# Altium PCB proLAYOUT_V3.PcbDoc
Units mm, origin at the board's own origin, x right, y up, seen from the top; angles counter-clockwise.
Board outline 152.4 x 101.6 mm, 2 copper layers (Top Layer, Bottom Layer); 82 components, 52 nets, 262 pads, 27 vias.
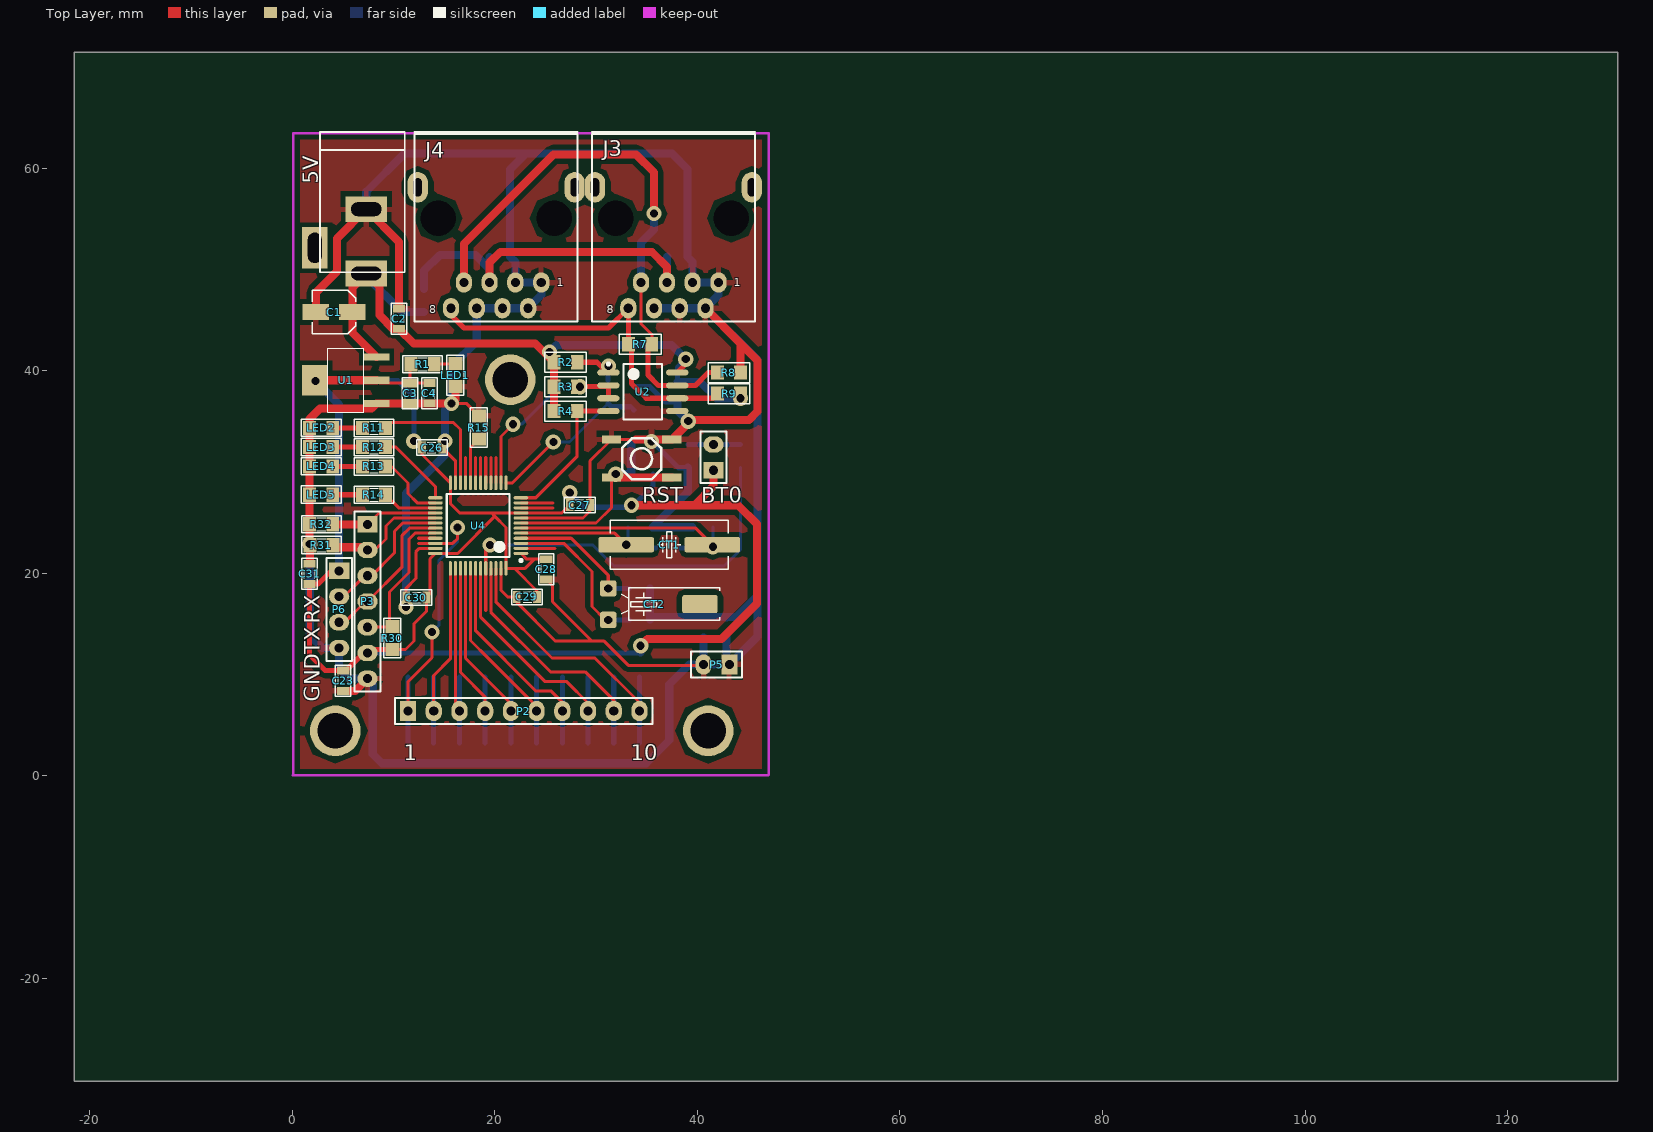
[diagram p0: Top Layer view]
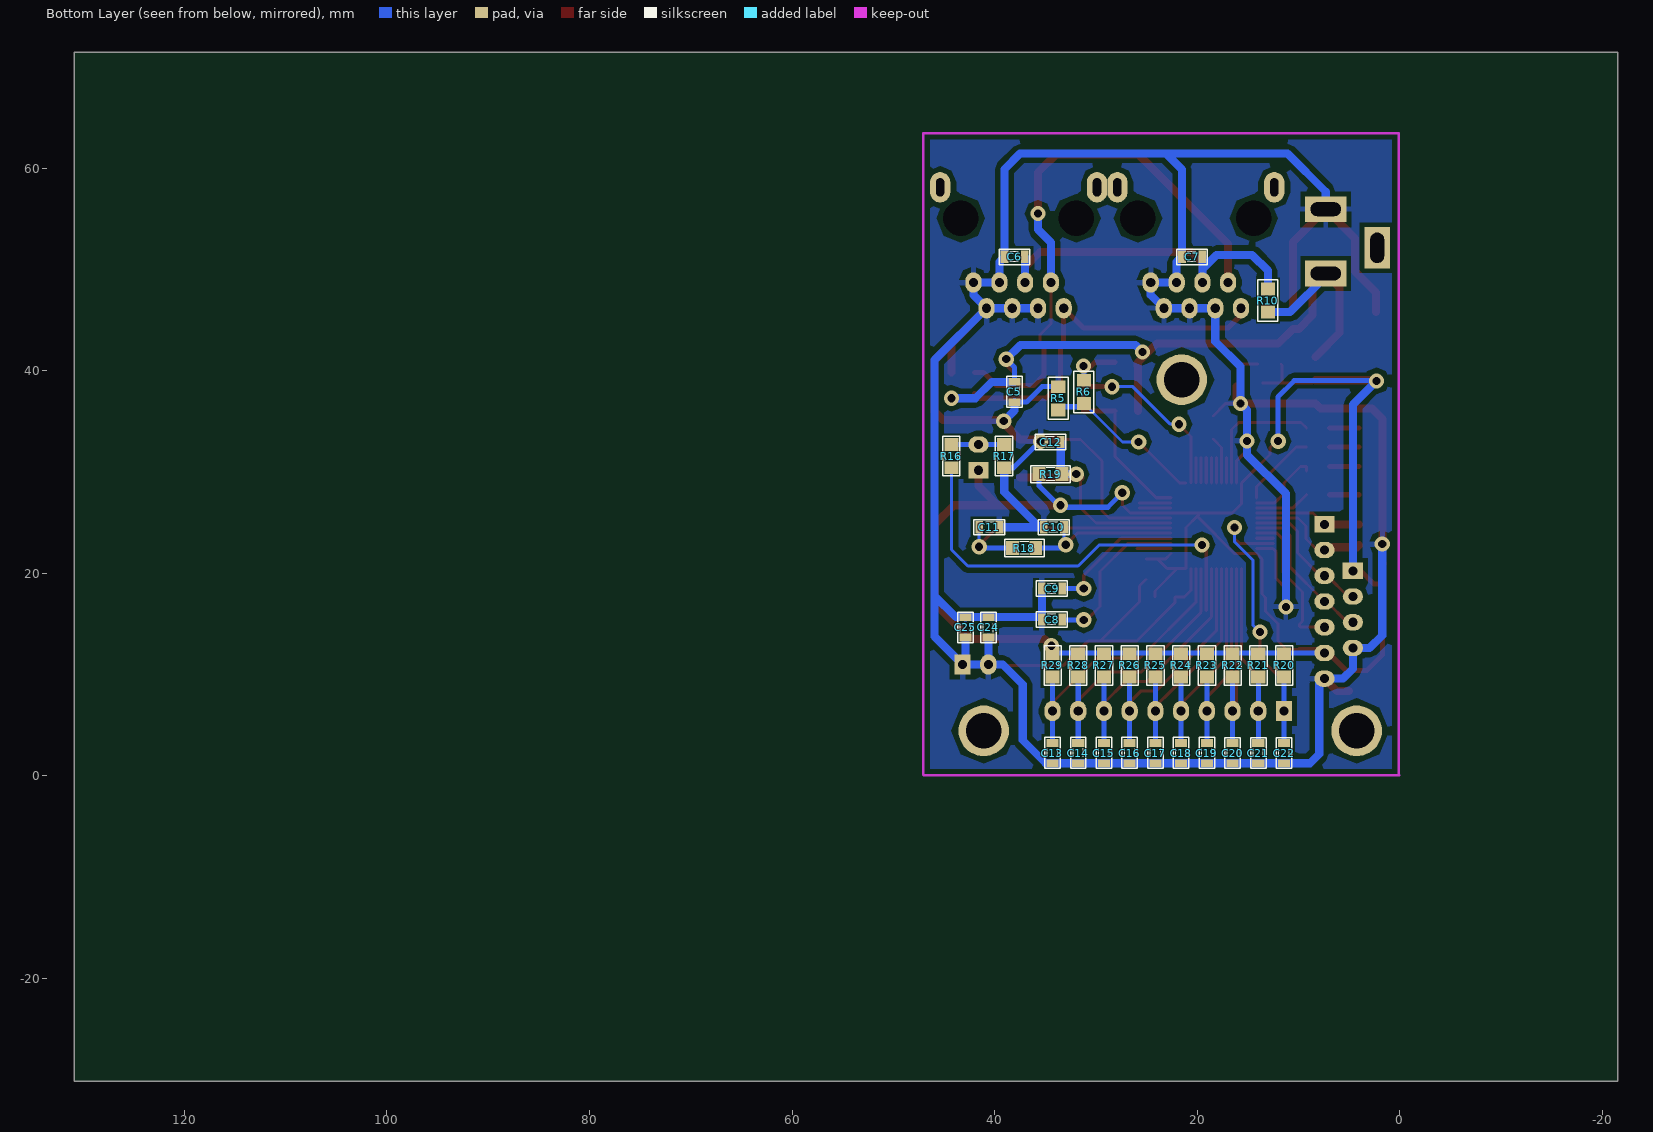
[diagram p1: Bottom Layer view, seen from below]
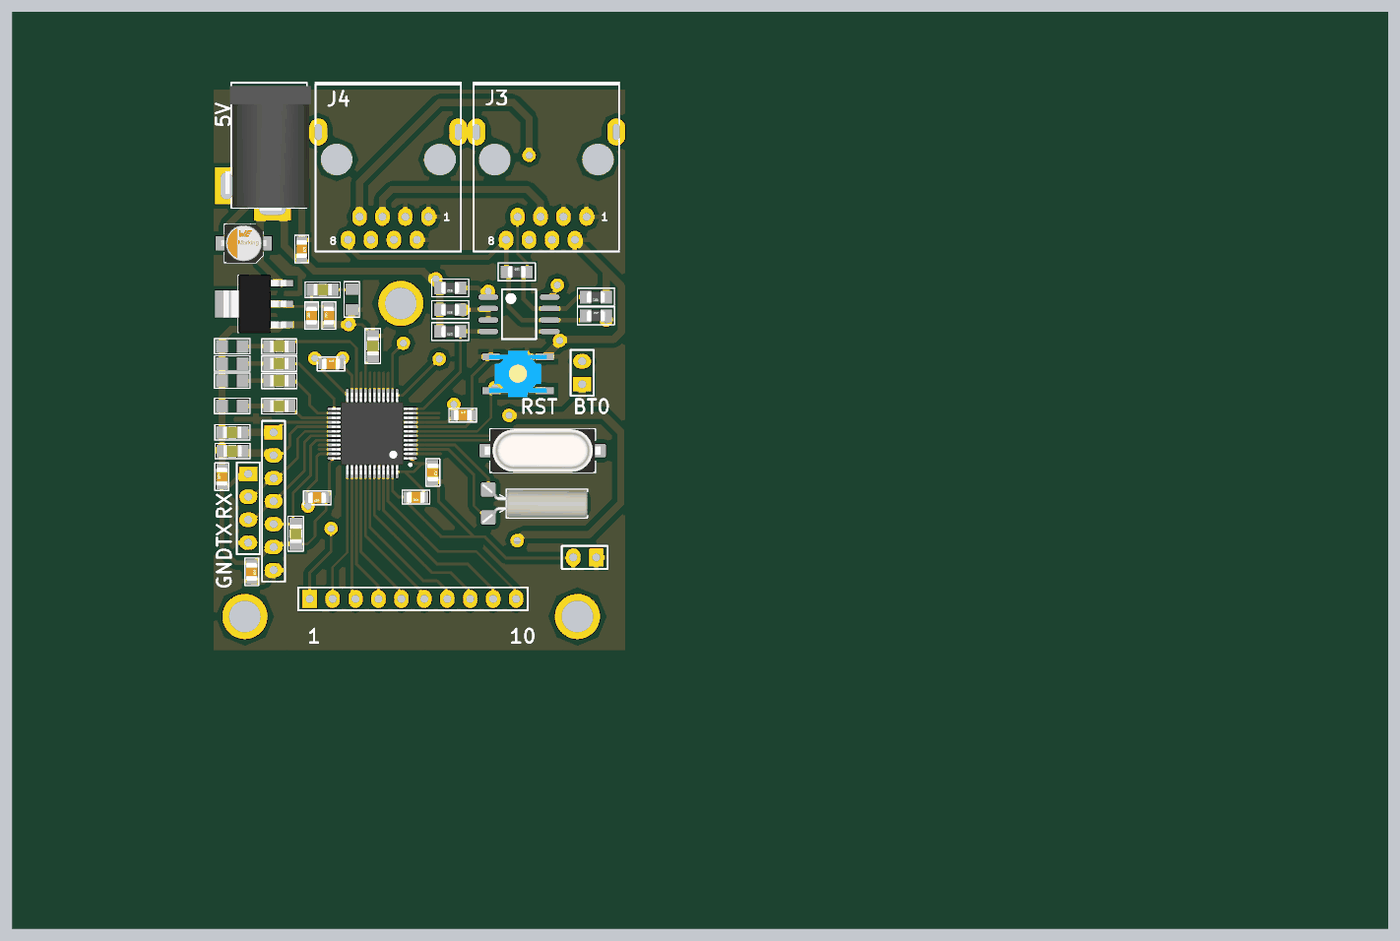
[diagram p2: 3D render of the assembled board from above, using the file's embedded part models]
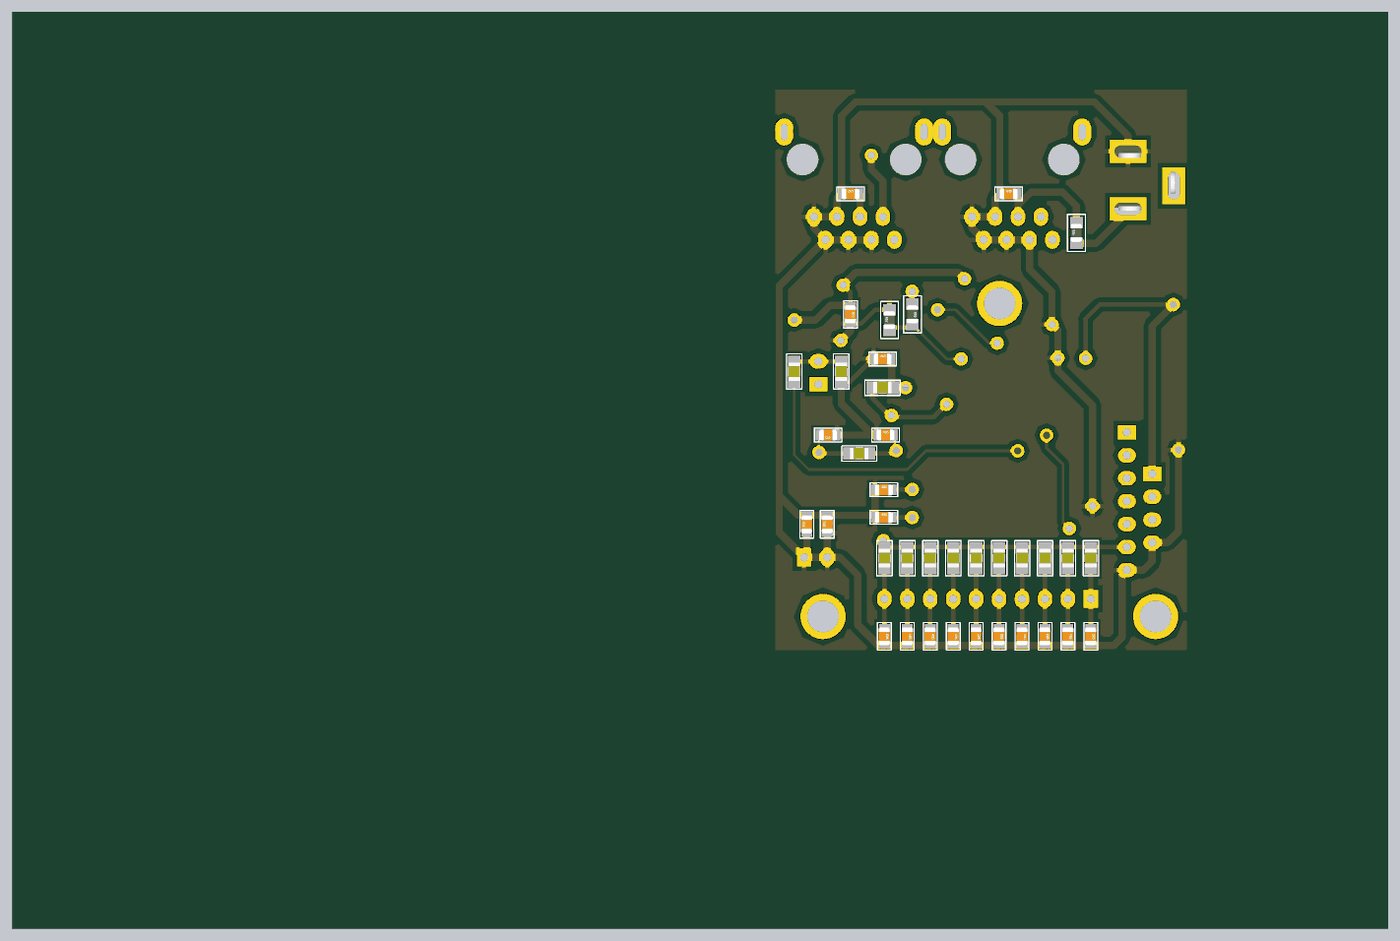
[diagram p3: 3D render of the assembled board from below, using the file's embedded part models]

## Layer stack, top to bottom
Top Solder: solder mask 0.0102, Solder Resist, Dk 3.5
Top Layer: signal copper 0.0356
Dielectric 1: dielectric 0.32, FR-4, Dk 4.8
Bottom Layer: signal copper 0.0356
Bottom Solder: solder mask 0.0102, Solder Resist, Dk 3.5

## Board outline
-21.525,-30.15 130.875,-30.15 130.875,71.45 -21.525,71.45

## Design rules (kind name [scope] priority, off if disabled: settings)
Clearance [All] p1: gap=0.5
ComponentClearance [All] p1: gap=0.2 collisioncheckmode=3 verticalgap=0.2 showdistances=FALSE
HoleSize [All] p1 off: absolutevalues=TRUE maxlimit=2.54 minlimit=0.025 maxpercent=80.000 minpercent=20.000
HoleToHoleClearance [All] p1 off: gap=0.254 allowstackedmicrovias=TRUE
LayerPairs [All] p1 off: enforce=TRUE
MinimumSolderMaskSliver [All] p1 off: minsoldermaskwidth=0.254
PolygonConnect [All] p1: connectstyle=Relief reliefconductorwidth=0.5 reliefentries=4 polygonreliefangle="90 Angle" airgapwidth=0.5
RoomDefinition proLAYOUT [InComponentClass('proLAYOUT')] p1: confinementstyle=ConfineIn formatcopy=TRUE lockcomponents=FALSE outline 132.018,-28.626 638.24,-28.626 638.24,-0.178 132.018,-0.178
RoutingPriority SINGAL_PRIO [All] p1: routingpriority=2
RoutingPriority POWER_PRIO [(InNet('VCC3.3V') OR InNet('VCC5V') OR InNet('GND'))] p2: routingpriority=1
RoutingVias [All] p1: holewidth=0.8 width=1.5 viastyle="Through Hole" minholewidth=0.8 minwidth=1.5 maxholewidth=1 maxwidth=2
SilkToSilkClearance [All] p1 off: silktosilkclearance=0.254
SilkToSolderMaskClearance [IsPad] p1 off: minsilkscreentomaskgap=0.254 clearancetoexposedcopper=TRUE
SolderMaskExpansion [All] p1: expansion=0.102
Width SIGNAL_LINE [All] p1: maxlimit=0.8 minlimit=0.3 preferedwidth=0.5
Width POWER_LINE [(InNet('VCC5V') OR InNet('VCC3.3V') OR InNet('GND'))] p2: maxlimit=0.8 minlimit=0.3 preferedwidth=0.5
22 further rules are at their usual default settings.

## Components (designator, comment, footprint, x,y, rotation, side; value= is the part's Value field where it differs from the comment)
5V "5V" DC-IN 4.764,52.781 r270 top (schematic designator VCC)
BT0 "BOOT0" HDR1X2 41.594,30.175 r90 top (schematic designator P1)
C1 "10µF" CAP-ALU-SMD-4.5x5x1.4 4.129,45.796 r180 top
C2 "104" SM-CAP-0805#1 10.55,46.3 r270 top
C3 "10uF" SM-CAP-0805#2 11.642,36.631 r90 top
C4 "104" SM-CAP-0805#1 13.547,36.631 r90 top
C5 "104" SM-CAP-0805#1 38.038,39.065 r270 bottom
C6 "104" SM-CAP-0805#1 39.181,51.257 r180 bottom
C7 "104" SM-CAP-0805#1 21.655,51.257 r180 bottom
C8 "10pF" SM-CAP-0805#1 35.486,15.439 r180 bottom
C9 "10pF" SM-CAP-0805#1 35.486,18.487 r180 bottom
C10 "22pF" SM-CAP-0805#1 35.306,24.552 r180 bottom
C11 "22pF" SM-CAP-0805#1 39.37,24.552 r0 bottom
C12 "104" SM-CAP-0805#1 35.625,32.969 r180 bottom
C13 "104" SM-CAP-0805#1 34.285,3.41 r270 bottom
C14 "104" SM-CAP-0805#1 31.745,3.41 r270 bottom
C15 "104" SM-CAP-0805#1 29.205,3.41 r270 bottom
C16 "104" SM-CAP-0805#1 26.665,3.41 r270 bottom
C17 "104" SM-CAP-0805#1 24.125,3.41 r270 bottom
C18 "104" SM-CAP-0805#1 21.585,3.41 r270 bottom
C19 "104" SM-CAP-0805#1 19.045,3.41 r270 bottom
C20 "104" SM-CAP-0805#1 16.505,3.41 r270 bottom
C21 "104" SM-CAP-0805#1 13.965,3.41 r270 bottom
C22 "104" SM-CAP-0805#1 11.425,3.41 r270 bottom
C23 "104" SM-CAP-0805#1 5.025,10.55 r270 top
C24 "104" SM-CAP-0805#1 40.619,13.511 r90 bottom
C25 "104" SM-CAP-0805#1 42.88,13.511 r90 bottom
C26 "104" SM-CAP-0805#1 12.65,32.425 r0 top
C27 "104" SM-CAP-0805#1 27.243,26.746 r0 top
C28 "104" SM-CAP-0805#1 25.075,21.55 r270 top
C29 "104" SM-CAP-0805#1 24.325,17.675 r180 top
C30 "104" SM-CAP-0805#1 13.4,17.602 r180 top
C31 "104" SM-CAP-0805#1 1.7,18.8 r90 top
CT1 "8Mhz" CRYSTAL_HC49-US-SM 37.225,22.825 r180 top
CT2 "32.768Khz" "CRYSTAL SMD 32,768 kHz" 33.2,16.963 r180 top
J3 "RJ45" "RJ45 - 18" 37.635,50.622 r0 top
J4 "RJ45" "RJ45 - 18" 20.131,50.622 r0 top
LED1 "LED" L-0805 16.1,39.575 r270 top
LED2 "LED" L-0805 2.859,34.366 r180 top
LED3 "LED" L-0805 2.859,32.461 r180 top
LED4 "LED" L-0805 2.859,30.556 r180 top
LED5 "LED" L-0805 2.859,27.762 r180 top
P2 "IRQ_HEADER" HDR1X10 11.425,6.401 r0 top
P3 "RF_HEAD_1" HDR1X7 7.431,24.841 r270 top
P5 "IRQ_PW" HDR1X2 43.159,10.997 r180 top
P6 "UART" HDR1X4 4.625,20.25 r270 top
R1 "1K" SM-0805 12.875,40.65 r0 top
R2 "10K" R-0805 26.989,40.843 r180 top
R3 "10K" R-0805 26.989,38.43 r180 top
R4 "10K" R-0805 26.989,36.017 r180 top
R5 "1.5K" R-0805 33.72,37.287 r90 bottom
R6 "1K" R-0805 31.18,37.922 r270 bottom
R7 "120R" R-0805 34.355,42.621 r0 top
R8 "22K" R-0805 43.118,39.827 r180 top
R9 "22K" R-0805 43.125,37.75 r0 top
R10 "0R" R-0805 13.019,46.939 r90 bottom
R11 "1K" SM-0805 8.066,34.366 r0 top
R12 "1K" SM-0805 8.066,32.461 r0 top
R13 "1K" SM-0805 8.066,30.556 r0 top
R14 "1K" SM-0805 8.066,27.762 r0 top
R15 "10K" SM-0805 18.425,34.4 r270 top
R16 "10K" SM-0805 44.261,31.572 r270 bottom
R17 "10K" SM-0805 39.054,31.572 r270 bottom
R18 "1M" SM-0805 37.075,22.5 r0 bottom
R19 "10K" SM-0805 34.482,29.794 r180 bottom
R20 "10K" SM-0805 11.425,10.922 r90 bottom
R21 "10K" SM-0805 13.965,10.922 r90 bottom
R22 "10K" SM-0805 16.505,10.922 r90 bottom
R23 "10K" SM-0805 19.045,10.922 r90 bottom
R24 "10K" SM-0805 21.585,10.922 r90 bottom
R25 "10K" SM-0805 24.125,10.922 r90 bottom
R26 "10K" SM-0805 26.665,10.922 r90 bottom
R27 "10K" SM-0805 29.205,10.922 r90 bottom
R28 "10K" SM-0805 31.745,10.922 r90 bottom
R29 "10K" SM-0805 34.285,10.922 r90 bottom
R30 "10K" SM-0805 9.895,13.614 r270 top
R31 "10K" SM-0805 2.875,22.775 r180 top
R32 "10K" SM-0805 2.859,24.841 r180 top
RST "RESET" "SW4 CMD M" 34.482,31.318 r0 top (schematic designator SW1)
U1 "LM1117-3.3V" LM1117-SOP 7.05,39.065 r90 top
U2 "MAX485" SO8W_N 34.609,37.922 r0 top
U4 "STM32F103C8T6" STM32_LQPF48 18.353,24.714 r180 top

## Footprints (in the part's own frame and the unit in brackets; to place one, negate y for a bottom-side part, rotate by r counter-clockwise, add the part's x,y. Pads: shape width x height; smd on the part's side, far side on the other; paste and mask are expansions set on the pad)
CAP-ALU-SMD-4.5x5x1.4 [mm]
  rect 2.6x1.6 smd: 1(-1.8,0) 2(1.8,0)
  silkscreen extent -2.15,-2.15 2.15,2.15, body extent -2.5,-2.15 2.5,2.15, height 5.45
"CRYSTAL SMD 32,768 kHz" [mm] "SMD Crystal CMR309T package"
  round 0.508 on Mech15: 0(0,0)
  rrect25% 1.6x1.6 smd: 1(2,-1.55) 2(2,1.55)
  rrect25% 3.5x1.8 smd: SH(-7.05,0)
  silkscreen extent -9,-1.6 0.72,1.6, body extent -9,-2.25 2.73,2.25, height 3.07
CRYSTAL_HC49-US-SM [mm] "SMD Crystal HC49/US-SM package"
  round 0.508 on Mech15: 0(0,0)
  rrect25% 5.5x1.5 smd: 1(-4.25,0) 2(4.25,0)
  silkscreen extent -5.84,-2.41 5.84,2.41, body extent -6.4,-2.41 6.4,2.42, height 4.29
DC-IN [mm] "Jac DC input"
  rect 2.54x4.064 hole 1.35 slot 3 at 90 deg: 1(3.175,2.54) 2(-3.175,2.54)
  rect 4.064x2.54 hole 1.35 slot 3 at 0 deg: 3(0.635,-2.54)
  silkscreen extent -10.8,-2.03 3.05,6.35, body extent -10.42,-2.67 3.4,6.84, height 11.02
HDR1X2 [mm] "Connector; Header; 2 Position"
  rect 1.6x2 hole 0.9: 1(0,0)
  oval 1.6x2 hole 0.9: 2(2.54,0)
  silkscreen extent -1.27,-1.27 3.81,1.27, body extent -1.27,-1.27 3.81,1.27, height 7
HDR1X4 [mm] "Connector; Header; 4 Position"
  rect 1.6x2 hole 0.9: 1(0,0)
  oval 1.6x2 hole 0.9: 2(2.54,0) 3(5.08,0) 4(7.62,0)
  silkscreen extent -1.27,-1.27 8.89,1.27, body extent -1.27,-1.27 8.89,1.27, height 7
HDR1X7 [mm] "Connector; Header; 7 Position"
  rect 1.6x2 hole 0.9: 1(0,0)
  oval 1.6x2 hole 0.9: 2(2.54,0) 3(5.08,0) 4(7.62,0) 5(10.16,0) 6(12.7,0) 7(15.24,0)
  silkscreen extent -1.27,-1.27 16.51,1.27, body extent -1.27,-1.27 16.51,1.27, height 7
HDR1X10 [mm] "Connector; Header; 10 Position"
  rect 1.6x2 hole 0.9: 1(0,0)
  oval 1.6x2 hole 0.9: 2(2.54,0) 3(5.08,0) 4(7.62,0) 5(10.16,0) 6(12.7,0) 7(15.24,0) 8(17.78,0) 9(20.32,0) 10(22.86,0)
  silkscreen extent -1.27,-1.27 24.13,1.27, body extent -1.27,-1.27 24.13,1.27, height 7
L-0805 [mil] "Compoment SMD 80x50mil"
  rect 50x55 smd: 1(-45,0) 2(45,0)
  silkscreen extent -77,-34 78,33, body extent -50,-20 50,20, height 43
LM1117-SOP [mm]
  rect 0.7x2.54 smd: 1(-2.3,-1.27) 2(0,-1.27) 3(2.3,-1.27)
  rect 3x2.54 smd: 2(0,4.826)
  silkscreen extent -3.18,0 3.17,3.56, body extent -3.25,-1.78 3.25,5.18, height 1.68
R-0805 [mil] "Compoment SMD 80x50mil"
  rect 50x55 smd: 1(-45,0) 2(45,0)
  silkscreen extent -81,-39 81,39, body extent -39,-25 39,25, height 31
"RJ45 - 18" [mm] "Single Port RJ45 Connector with Intergrated Magetic (LAN) - NonLED"
  oval 2x3 hole 0.8 slot 1.8 at 90 deg: 0(-7.745,7.495) 0(7.745,7.495)
  oval 1.6x2 hole 0.9: 1(4.458,-1.905) 2(3.162,-4.445) 3(1.892,-1.905)
  oval 1.6x2 hole 0.9 paste+2.54: 4(0.622,-4.445) 5(-0.648,-1.905) 6(-1.918,-4.445) 7(-3.188,-1.905) 8(-4.458,-4.445)
  round 2 hole 3.5 paste+2.54: Hole1(-5.715,4.445) Hole1(5.715,4.445)
  silkscreen extent -8.05,-5.74 8.05,12.95
SM-0805 [mil] "Compoment SMD 80x50mil"
  rect 50x55 smd: 1(-45,0) 2(45,0)
  silkscreen extent -77,-34 76,33, body extent -40,-25 40,25, height 24
SM-CAP-0805#1 [mil]
  rect 30x47.24 smd: 1(6,0) 2(85,0)
  silkscreen extent -15,-30 105,30, body extent 6,-25 84,25, height 31
SM-CAP-0805#2 [mil]
  rect 35.43x55.12 smd: 1(6,0) 2(85,0)
  silkscreen extent -15,-30 105,30, body extent 6,-25 84,25, height 31
SO8W_N [mm] "SOP, 8-Leads, Body 5.3x5.3mm, Pitch 1.27mm, IPC Medium Density"
  oval 2.2x0.6 smd: 1(-3.4,1.905) 2(-3.4,0.635) 3(-3.4,-0.635) 4(-3.4,-1.905) 5(3.4,-1.905) 6(3.4,-0.635) 7(3.4,0.635) 8(3.4,1.905)
  silkscreen extent -3.52,-2.75 1.9,2.88, body extent -2.73,-2.75 2.73,2.75, height 2.13
STM32_LQPF48 [mm]
  oval 1.45x0.3 smd: 1(-4.225,2.75) 2(-4.225,2.25) 3(-4.225,1.75) 4(-4.225,1.25) 5(-4.225,0.75) 6(-4.225,0.25) 7(-4.225,-0.25) 8(-4.225,-0.75) 9(-4.225,-1.25) 10(-4.225,-1.75) 11(-4.225,-2.25) 12(-4.225,-2.75) 25(4.225,-2.75) 26(4.225,-2.25) 27(4.225,-1.75) 28(4.225,-1.25) 29(4.225,-0.75) 30(4.225,-0.25) 31(4.225,0.25) 32(4.225,0.75) 33(4.225,1.25) 34(4.225,1.75) 35(4.225,2.25) 36(4.225,2.75)
  oval 0.3x1.45 smd: 13(-2.75,-4.225) 14(-2.25,-4.225) 15(-1.75,-4.225) 16(-1.25,-4.225) 17(-0.75,-4.225) 18(-0.25,-4.225) 19(0.25,-4.225) 20(0.75,-4.225) 21(1.25,-4.225) 22(1.75,-4.225) 23(2.25,-4.225) 24(2.75,-4.225) 37(2.75,4.225) 38(2.25,4.225) 39(1.75,4.225) 40(1.25,4.225) 41(0.75,4.225) 42(0.25,4.225) 43(-0.25,4.225) 44(-0.75,4.225) 45(-1.25,4.225) 46(-1.75,4.225) 47(-2.25,4.225) 48(-2.75,4.225)
  silkscreen extent -4.35,-3.1 3.1,3.57, body extent -4.5,-4.5 4.5,4.5, height 1.6
"SW4 CMD M" [mil]
  rect 75x30 smd: 1(-117,75) 1(118,75) 2(-117,-73) 2(118,-73)
  silkscreen extent -75,-80 76,79, body extent -126,-101 126,103, height 60

## Part data
5V: library part DCIN
BT0 P5: library part "Header 2", "Header, 2-Pin"
C1: library part "CAP Aluminum"
C2 C3 C4 C5 C6 C7 C8 C9 C10 C11 C12 C13 C14 C15 C16 C17 C18 C19 C20 C21 C22 C23 C24 C25 C26 C27 C28 C29 C30 C31: library part "CAP SMD"
CT1 CT2: library part CRYSTAL, "Crystal For all Crystal 2pin."
J3 J4: library part RJ45-LAN, "Single RJ45 Connector Non LED"
LED1 LED2 LED3 LED4 LED5: "LED Single colour Green and Red"
P2: library part "Header 10", "Header, 10-Pin"
P3: library part "Header 7", "Header, 7-Pin"
P6: library part "Header 4", "Header, 4-Pin"
R1 R11 R12 R13 R14 R15 R16 R17 R18 R19 R20 R21 R22 R23 R24 R25 R26 R27 R28 R29 R30 R31 R32: library part RM, "Resistor SMD"
R2 R3 R4 R5 R6 R7 R8 R9 R10: library part R, "Resistor 1/4W"
RST: library part SW4-1, "Switch button 4 pin"
U1: library part LM1117, "800mA Low-Dropout Linear Regulator"
U2: library part max485_smd
U4: library part STM32F103xx_LQFP48, "STM32 ARM-based 32-bit MCU with 64 Kbytes Flash, 48-pin LQFP, Industrial Temperature"

## Free pads (board coordinates)
  round 5 hole 3.5: 1(41.075,4.45) 2(4.25,4.45) 3(21.525,39.125)

## Via types
v1: diameter 1.5, hole 0.8, Top Layer to Bottom Layer, 27 vias

## Nets (pads, with @x,y where several pads share a name; then routed paths per layer and width w, separated by ;. In a path a pad name is that pad's centre, name@x,y a point inside that pad or via, vN(x,y) a via of type N, cw(c..) or ccw(c..) an arc to the next point about the centre after c; other vN are vias at no path point)
BOOT_0: R16.2 U4.44 | length 41
  Top Layer w0.3: 19.103,16.325 U4.44 19.103,22.378 v1(19.525,22.8)
  Bottom Layer w0.3: v1(19.525,22.8) 29.675,22.8 31.75,20.725 42.65,20.725 44.261,22.336 R16.2
BOOT_1: R15.2 U4.20 | length 4.7
  Top Layer w0.3: U4.20 17.603,32.435 R15.2
GND: 5V.2 C1.2 C2.1 C3.1 C4.1 C5.2 C6.1 C7.1 C8.1 C9.1 C10.1 C11.1 C12.1 C13.2 C14.2 C15.2 C16.2 C17.2 C18.2 C19.2 C20.2 C21.2 C22.2 C23.2 C24.1 C24.2 C25.1 C25.2 C26.2 C27.2 C28.2 C29.2 C30.2 C31.2 J3.1 J3.2 J3.3 J3.4 J3.6 J4.1 J4.2 J4.3 J4.4 J4.6 LED1.2 LED2.2 LED3.2 LED4.2 LED5.2 P3.7 P5.1 P5.2 P6.4 R5.2 R8.1 R15.1 R17.2 R31.2 R32.2 RST.1 U1.1 U2.5 U4.8 U4.23 U4.35 U4.47 | length 416.6
  Top Layer w0.3: v1(11.241,16.684) C30.2 11.241,18.541 12.2,19.5 12.2,22.125 12.539,22.464 U4.35 ; C26.2 16.103,31.131 U4.23 ; v1(15.733,36.783) 17.185,36.783 R15.1 ; U4.47 20.603,18.322 21.25,17.675 C29.2 22.166,17.134 26,13.3 29.6,13.3 ; U4.8 28.714,25.464 29.402,26.152 C27.2 29.402,31.115 31.51,33.223 33.95,33.223 ; C28.2 25.7,18.766 25.7,17.2 29.6,13.3 ; P5.2 40.544,10.922 33.178,10.922 30.8,13.3 29.6,13.3
  Top Layer w0.8: C31.2 1.732,20.991 R31.2 1.732,22.893 v1(1.725,22.9) ; R31.2@1.716,22.791 LED5.2 LED4.2 LED3.2 LED2.2 1.716,35.241 2.75,36.275 7.83,36.275 U1.1 13.529,36.765 C4.1 v1(15.733,36.783) 16.1,37.15 LED1.2 ; C1.2 2.329,47.729 4.4,49.8 4.4,53.052 5V.2 10.55,52.71 C2.1 ; C23.2 6.221,8.391 P3.7 ; 33.95,33.223 v1@35.473,33.223 ; v1@35.475,33.223 37.479,33.223 39.406,35.15 45.1,35.15 45.95,36 45.95,41.024 44.261,42.713 ; J3.2 44.261,42.713 ; R8.1 44.261,42.713
  Bottom Layer w0.5: R5.2 35.32,38.43 36.844,36.906 C5.2 ; v1(35.473,33.023) C12.1 35.606,32.969 38.146,30.429 R17.2
  Bottom Layer w0.8: v1(1.725,22.9) 1.725,13.875 2.97,12.63 P6.4 4.625,10.575 5.599,9.601 P3.7 7.95,9.082 7.95,2.178 8.876,1.251 34.951,1.251 37.225,3.525 37.225,5.9 37.225,9.025 39.197,10.997 P5.2 ; 5V.2 7.304,57.679 11.075,61.45 23.075,61.45 ; v1(11.241,16.684) 11.241,27.866 15.075,31.7 v1(15.075,33.076) 15.075,36.125 v1(15.733,36.783) 15.733,40.408 18.213,42.888 J4.6 J4.4 J4.2 24.589,47.472 J4.1 J4.3 22.023,50.736 C7.1 21.503,59.878 23.075,61.45 ; C9.1 C8.1 ; C8.1@35.49,15.595 C8.1 ; J3.6 J3.4 J3.2 ; C5.2 38.038,36.087 v1(39.101,35.024) ; R17.2 39.054,28.031 35.575,24.552 C11.1 ; C24.1 P5.2 ; C25.1 42.88,11.276 P5.1 ; P5.1@43.497,10.997 P5.1 ; 23.075,61.45 37.482,61.45 39.029,59.904 C6.1 39.527,50.758 J3.3 J3.1 42.093,47.472 J3.2 ; C8.1 35.565,15.67 C24.2 42.879,15.67 43.82,15.67 45.925,17.775 ; P5.2 P5.1 ; J3.2 45.925,41.049 45.925,17.775 ; P5.1 45.925,13.763 45.925,17.775
IRQ_1: C22.1 P2.1 R20.1 U4.34 | length 32.3
  Top Layer w0.3: P2.1 11.425,9.3 13.8,11.675 v1(13.8,14.2) ; 12.464,22.964 U4.34 15.839,22.964 16.325,23.45 16.325,24.751 v1(16.325,24.525)
  Bottom Layer w0.3: v1(13.8,14.2) 14.5,14.9 14.5,21.325 16.328,23.153 16.325,23.156 v1(16.325,24.525)
  Bottom Layer w0.5: C22.1 P2.1 R20.1
IRQ_2: C21.1 P2.2 R21.1 U4.37 | length 21.3
  Top Layer w0.3: P2.2 13.965,9.915 15.603,11.553 U4.37
  Bottom Layer w0.5: C21.1 P2.2 R21.1
IRQ_3: C20.1 P2.3 R22.1 U4.38 | length 20.8
  Top Layer w0.3: U4.38 16.103,6.803 P2.3
  Bottom Layer w0.5: C20.1 P2.3 R22.1
IRQ_4: C19.1 P2.4 R23.1 U4.39 | length 21.6
  Top Layer w0.3: U4.39 16.603,10.222 19.045,7.78 P2.4
  Bottom Layer w0.5: C19.1 P2.4 R23.1
IRQ_5: C18.1 P2.5 R24.1 U4.40 | length 22.5
  Top Layer w0.3: U4.40 17.103,11.622 21.585,7.14 P2.5
  Bottom Layer w0.5: C18.1 P2.5 R24.1
IRQ_6: C17.1 P2.6 R25.1 U4.41 | length 23.3
  Top Layer w0.3: U4.41 17.603,13.375 17.703,13.275 19.309,11.669 22.52,8.458 24.125,6.853 P2.6
  Bottom Layer w0.5: C17.1 P2.6 R25.1
IRQ_7: C16.1 P2.7 R26.1 U4.42 | length 25
  Top Layer w0.3: U4.42 18.103,14.322 24.025,8.4 25.525,8.4 26.665,7.26 P2.7
  Bottom Layer w0.5: C16.1 P2.7 R26.1
IRQ_8: C15.1 P2.8 R27.1 U4.43 | length 26.2
  Top Layer w0.3: U4.43 18.603,15.675 24.978,9.3 27.1,9.3 29.205,7.195 P2.8
  Bottom Layer w0.5: C15.1 P2.8 R27.1
IRQ_9: C14.1 P2.9 R28.1 U4.45 | length 27.6
  Top Layer w0.3: U4.45 19.603,16.172 25.5,10.275 28.925,10.275 31.745,7.455 P2.9
  Bottom Layer w0.5: C14.1 P2.9 R28.1
IRQ_10: C13.1 P2.10 R29.1 U4.46 | length 29
  Top Layer w0.3: U4.46 20.103,17.197 25.65,11.65 29.875,11.65 34.285,7.24 P2.10
  Bottom Layer w0.5: C13.1 P2.10 R29.1
LED_1: R11.2 U4.22 | length 13.2
  Top Layer w0.3: R11.2 9.743,34.9 15.9,34.9 16.603,34.197 U4.22
LED_2: R12.2 U4.25 | length 7.6
  Top Layer w0.3: R12.2 10.25,32.461 14.128,28.583 U4.25
LED_3: R13.2 U4.26 | length 7.5
  Top Layer w0.3: R13.2@9.209,30.091 R13.2 9.794,30.556 11.425,28.925 11.425,27.875 12.336,26.964 U4.26
LED_4: R14.2 U4.27 | length 5.5
  Top Layer w0.3: R14.2 10.507,26.464 U4.27
M485_A: J3.8 J4.8 R7.1 R9.1 U2.6 | length 36.4
  Top Layer w0.5: J4.8 15.673,45.502 16.95,44.225 31.225,44.225 J3.8 33.212,46.142 R7.1 33.475,42.358 33.475,38.75 34.938,37.287 U2.6 41.519,37.287 R9.1
M485_B: J3.7 J4.7 R7.2 R8.2 U2.7 | length 55.9
  Top Layer w0.3: J3.7 34.447,44.628 35.498,43.577 R7.2
  Top Layer w0.5: R7.2 35.125,42.248 35.125,39.575 36.143,38.557 U2.7 39.807,38.557 41.077,39.827 R8.2
  Top Layer w0.8: J4.7 16.943,52.543 25.775,61.375 33.95,61.375 35.725,59.6 v1(35.725,55.525)
  Bottom Layer w0.8: J3.7 34.447,52.672 35.725,53.95 v1(35.725,55.525)
M485_DI: R4.1 U2.4 U4.12 | length 14.8
  Top Layer w0.3: U4.12 24.039,27.464 26.743,30.168 28.132,31.557 R4.1
  Top Layer w0.5: R4.1 U2.4
M485_EN: R3.1 U2.2 U2.3 U4.14 | length 18.8
  Top Layer w0.3: U4.14 20.603,33.503 21.8,34.7 v1(21.8,34.725)
  Top Layer w0.5: R3.1 v1(28.395,38.43) 31.082,38.43 U2.2 U2.3
  Bottom Layer w0.3: v1(21.8,34.725) 22.65,34.725 26.355,38.43 v1(28.395,38.43)
M485_PW: C6.2 C7.2 J3.5 J4.5 R10.2 | length 36.7
  Top Layer w0.8: J4.5 19.483,50.683 20.55,51.75 35.5,51.75 36.987,50.263 J3.5
  Bottom Layer w0.8: R10.2 13.019,49.894 14.575,51.45 18.075,51.45 19.483,50.042 ; J4.5 19.483,50.042 ; C7.2@19.483,51.244 19.483,50.042 ; J3.5 36.987,51.222 C6.2
M485_RO: R5.1 R6.2 U4.13 | length 16.1
  Top Layer w0.3: U4.13 21.739,28.939 v1(25.775,32.975)
  Bottom Layer w0.3: v1(25.775,32.975) 27.376,32.975 R6.2
  Bottom Layer w0.5: R6.2 31.509,36.45 33.414,36.45 R5.1
NetLED1_1: LED1.1 R1.2 | length 2.1
  Top Layer w0.3: R1.2 16.032,40.65 LED1.1
NetLED2_1: LED2.1 R11.1 | length 2.9
  Top Layer w0.5: LED2.1 R11.1
NetLED3_1: LED3.1 R12.1 | length 2.9
  Top Layer w0.5: LED3.1 R12.1
NetLED4_1: LED4.1 R13.1 | length 2.9
  Top Layer w0.5: LED4.1 R13.1
NetLED5_1: LED5.1 R14.1 | length 2.9
  Top Layer w0.5: LED5.1 R14.1
NetP1_2: BT0.2 R16.1 R17.1 | length 5.2
  Bottom Layer w0.5: R17.1 BT0.2 R16.1
NetR2_1: R2.1 R6.1 U2.1 | length 5.1
  Top Layer w0.5: R2.1 30.082,40.843 U2.1@30.834,40.091 ; U2.1 v1(31.209,40.466)
  Bottom Layer w0.5: R6.1 31.18,40.437 v1(31.209,40.466)
OSCIN: C10.2 CT1.2 R18.1 U4.5 | length 15.8
  Top Layer w0.3: U4.5 31.836,23.964 v1(32.975,22.825)
  Bottom Layer w0.3: v1(32.975,22.825) 33.147,22.997 C10.2
  Bottom Layer w0.5: v1(32.975,22.825) 33.3,22.5 R18.1
OSCOUT: C11.2 CT1.1 R18.2 U4.6 | length 24.9
  Top Layer w0.3: U4.6 39.836,24.464 CT1.1
  Bottom Layer w0.3: v1(41.525,22.625) 41.529,22.629 C11.2
  Bottom Layer w0.5: R18.2 41.4,22.5 v1(41.525,22.625)
PA1: U4.10 | length 3.2
  Top Layer w0.3: U4.10 25.736,26.464
PA2: U4.11 | length 3.2
  Top Layer w0.3: U4.11 25.764,26.964
PA5: U4.15 | length 2.5
  Top Layer w0.3: U4.15 20.103,31.425
PA6: U4.16 | length 2.5
  Top Layer w0.3: U4.16 19.603,31.425
PA7: U4.17 | length 2.5
  Top Layer w0.3: U4.17 19.103,31.425
PA12: U4.33 | length 1.7
  Top Layer w0.3: 12.464,23.464 U4.33
PB0: U4.18 | length 2.5
  Top Layer w0.3: U4.18 18.603,31.425
PB1: U4.19 | length 2.5
  Top Layer w0.3: U4.19 18.103,31.425
PB10: U4.21 | length 2.5
  Top Layer w0.3: U4.21 17.103,31.425
PC13: U4.2 | length 3.4
  Top Layer w0.3: U4.2 25.961,22.464
REAL_IN: C8.2 CT2.2 U4.3 | length 15.9
  Top Layer w0.3: U4.3 26.811,22.964 29.6,20.175 29.6,16.725 30.912,15.413 v1(31.2,15.413)
  Bottom Layer w0.3: C8.2@33.301,15.413 C8.2
  Bottom Layer w0.5: v1(31.2,15.413) C8.2@33.301,15.413
REAL_OUT: C9.2 CT2.1 U4.4 | length 13.6
  Top Layer w0.3: U4.4 27.536,23.464 31.2,19.8 v1(31.2,18.513)
  Bottom Layer w0.3: C9.2@33.301,18.513 C9.2
  Bottom Layer w0.5: v1(31.2,18.513) C9.2@33.301,18.513
RESET: C12.2 R19.2 RST.2 U4.7 | length 23.6
  Top Layer w0.3: U4.7 29.989,24.964 31.51,26.485 RST.2@31.51,29.464
  Top Layer w0.8: RST.2@31.51,29.464 RST.2@31.614,29.464 ; v1(31.944,29.794) RST.2@31.614,29.464 ; RST.2@37.479,29.464 RST.2@31.614,29.464
  Bottom Layer w0.8: v1(31.944,29.794) R19.2 33.466,29.921 C12.2
RF_AUX: P3.5 R30.1 U4.32 | length 14.9
  Top Layer w0.3: P3.5 9.819,14.681 R30.1 9.895,14.98 9.6,15.275 9.6,18.15 11.525,20.075 11.525,23.375 12.114,23.964 U4.32
RF_M0: P3.1 R32.1 U4.28 | length 10.6
  Top Layer w0.3: P3.1 8.554,25.964 U4.28
  Top Layer w0.8: R32.1 P3.1
RF_M1: P3.2 R31.1 U4.29 | length 12.4
  Top Layer w0.3: P3.2 8.151,22.301 9.25,23.4 9.25,24.675 10.039,25.464 U4.29
  Top Layer w0.8: R31.1 4.218,22.575 7.157,22.575 P3.2
RF_RXD: P3.3 P6.2 U4.30 | length 13.8
  Top Layer w0.3: P6.2 5.11,17.71 7.161,19.761 P3.3 7.836,19.761 10.095,22.02 10.095,24.145 10.914,24.964 U4.30
RF_TXD: P3.4 P6.3 U4.31 | length 15.2
  Top Layer w0.3: P6.3 5.17,15.17 7.221,17.221 P3.4 10.85,20.64 10.85,23.75 11.564,24.464 U4.31
VCC3.3V: BT0.1 C3.2 C4.2 C23.1 C26.1 C27.1 C28.1 C29.1 C30.1 C31.1 P3.6 P6.1 R1.1 R19.1 R20.2 R21.2 R22.2 R23.2 R24.2 R25.2 R26.2 R27.2 R28.2 R29.2 R30.2 U1.2 U4.1 U4.9 U4.24 U4.36 U4.48 | length 201.7
  Top Layer w0.3: U1.2@8.32,39.065 8.595,38.79 C3.2 ; R30.2 11.171,12.471 12.025,13.325 12.025,15.025 13.248,16.248 C30.1 13.6,17.954 13.6,21.436 U4.36 16.325,21.964 20,25.639 ; R1.1 11.642,40.56 C3.2 ; v1(12,33.05) 12.205,33.05 12.205,33.023 C26.1 12.802,31.74 U4.24 15.603,26.897 16.536,25.964 19.675,25.964 ; C4.2 C3.2 ; U4.1 23.144,21.398 23.9,21.398 ; C29.1 24.173,18.252 21.936,20.489 ; C28.1 23.9,21.398 ; v1(27.395,27.955) C27.1 26.613,25.964 U4.9 19.675,25.964 ; 19.675,25.964 20,25.639 ; 20,25.639 21.103,24.536 U4.48 21.936,20.489 ; 21.936,20.489 22.991,20.489 23.9,21.398
  Top Layer w0.5: P6.1 3.85,20.25 2.552,18.952 C31.1 1.7,11.95 3.252,10.398 C23.1 5.298,10.398 7.041,12.141 P3.6 7.761,12.471 R30.2
  Top Layer w0.8: U1.2@2.289,39.065 U1.2@8.32,39.065 ; v1(33.5,26.725) 39.7,26.725 ; v1(34.4,12.85) 35.075,13.525 42.375,13.525 45.875,17.025 45.875,24.875 44.025,26.725 39.7,26.725 ; BT0.1 41.594,28.619 39.7,26.725
  Bottom Layer w0.5: v1(2.289,39) 2.4,39 2.425,39.025 10.425,39.025 12.037,37.413 12,37.375 v1(12,33.05) ; P3.6 R28.2@31.745,12.141 ; v1(27.395,27.955) 28.825,26.525 v1@33.5,26.525 ; R28.2@31.745,12.115 34.285,12.115 R29.2@34.4,12.18 ; v1(33.5,26.725) v1@33.5,26.525 ; R19.1 35.625,28.65 v1@33.5,26.525
  Bottom Layer w0.8: v1(2.289,39) 4.625,36.664 P6.1 ; R29.2@34.4,12.18 v1(34.4,12.85)
VCC5V: 5V.1 C1.1 C2.2 C5.1 R2.2 R3.2 R4.2 R9.2 R10.1 U1.3 U2.8 | length 72.7
  Top Layer w0.5: U2.8 38.85,40.668 v1(38.85,41.15)
  Top Layer w0.8: U1.3 5.929,43.756 C1.1 5.929,48.231 5V.1 8.6,48.31 8.6,45.5 9.959,44.141 C2.2 11.991,42.7 23.989,42.7 R2.2@25.4,41.289 ; v1@25.65,41.85 v1(25.4,41.85) R2.2@25.4,41.289 ; R4.2 R3.2 R2.2@25.846,40.504 ; R2.2@25.4,41.289 R2.2 ; R2.2@25.846,40.504 R2.2 ; R2.2@25.846,40.504 25.9,40.45 25.9,40.789 R2.2
  Bottom Layer w0.5: C5.1 38.038,40.338 v1(38.85,41.15)
  Bottom Layer w0.8: 5V.1 7.304,49.321 10.829,45.796 R10.1 ; v1(25.4,41.85) 26.1,42.55 37.45,42.55 v1(38.85,41.15) ; C5.1 40.287,38.913 41.907,37.293 v1(44.268,37.293)
pads on no net: 5V.3 CT1.0 CT2.0 CT2.SH J3.0 J3.Hole1 J4.0 J4.Hole1

## Polygon pours and split planes (outlines as drawn)
GND on Top Layer "Top Layer-No Net" (solid, pour order 4): 0.1,63.475 47.05,63.475 47.05,0.125 46.975,0.05 46.9,0.125 0.1,0.125
GND on Bottom Layer "Top Layer-No Net" (solid, pour order 6): 0.15,63.7 46.825,63.7 47.05,63.475 47.05,0.125 0.1,0.125

## Keep-outs
Keep-Out Layer:
  lines w0.254: 0.025,0.05 0.1,0.125 0.1,63.475 47.05,63.475 47.05,0.125 46.975,0.05 0.025,0.05

## Silkscreen, mask and mechanical layers (free items; w line width, h text height)
Top Overlay:
  text "RX" at 2.7,15 h1.52 r90
  text "TX" at 2.7,12 h1.52 r90
  text "GND" at 2.7,7.325 h1.52 r90
  text "1" at 11.025,1.55 h1.52
  text "10" at 33.4,1.55 h1.52

## Text inside footprints (layer, text, board x,y; h text height)
J3: Top Overlay "8" at 31.031,45.669 h0.8; Top Overlay "1" at 43.604,48.336 h0.8
J4: Top Overlay "8" at 13.527,45.669 h0.8; Top Overlay "1" at 26.1,48.336 h0.8